# Altium PCB DigitalLabBoard-CS.PcbDoc (part 2 of 3)
Units mm, origin at the board's own origin, x right, y up, seen from the top; angles counter-clockwise.
Board outline 155 x 110 mm, 2 copper layers (Top Layer, Bottom Layer), stack 1.571 mm thick; 189 components, 184 nets, 775 pads, 859 vias.
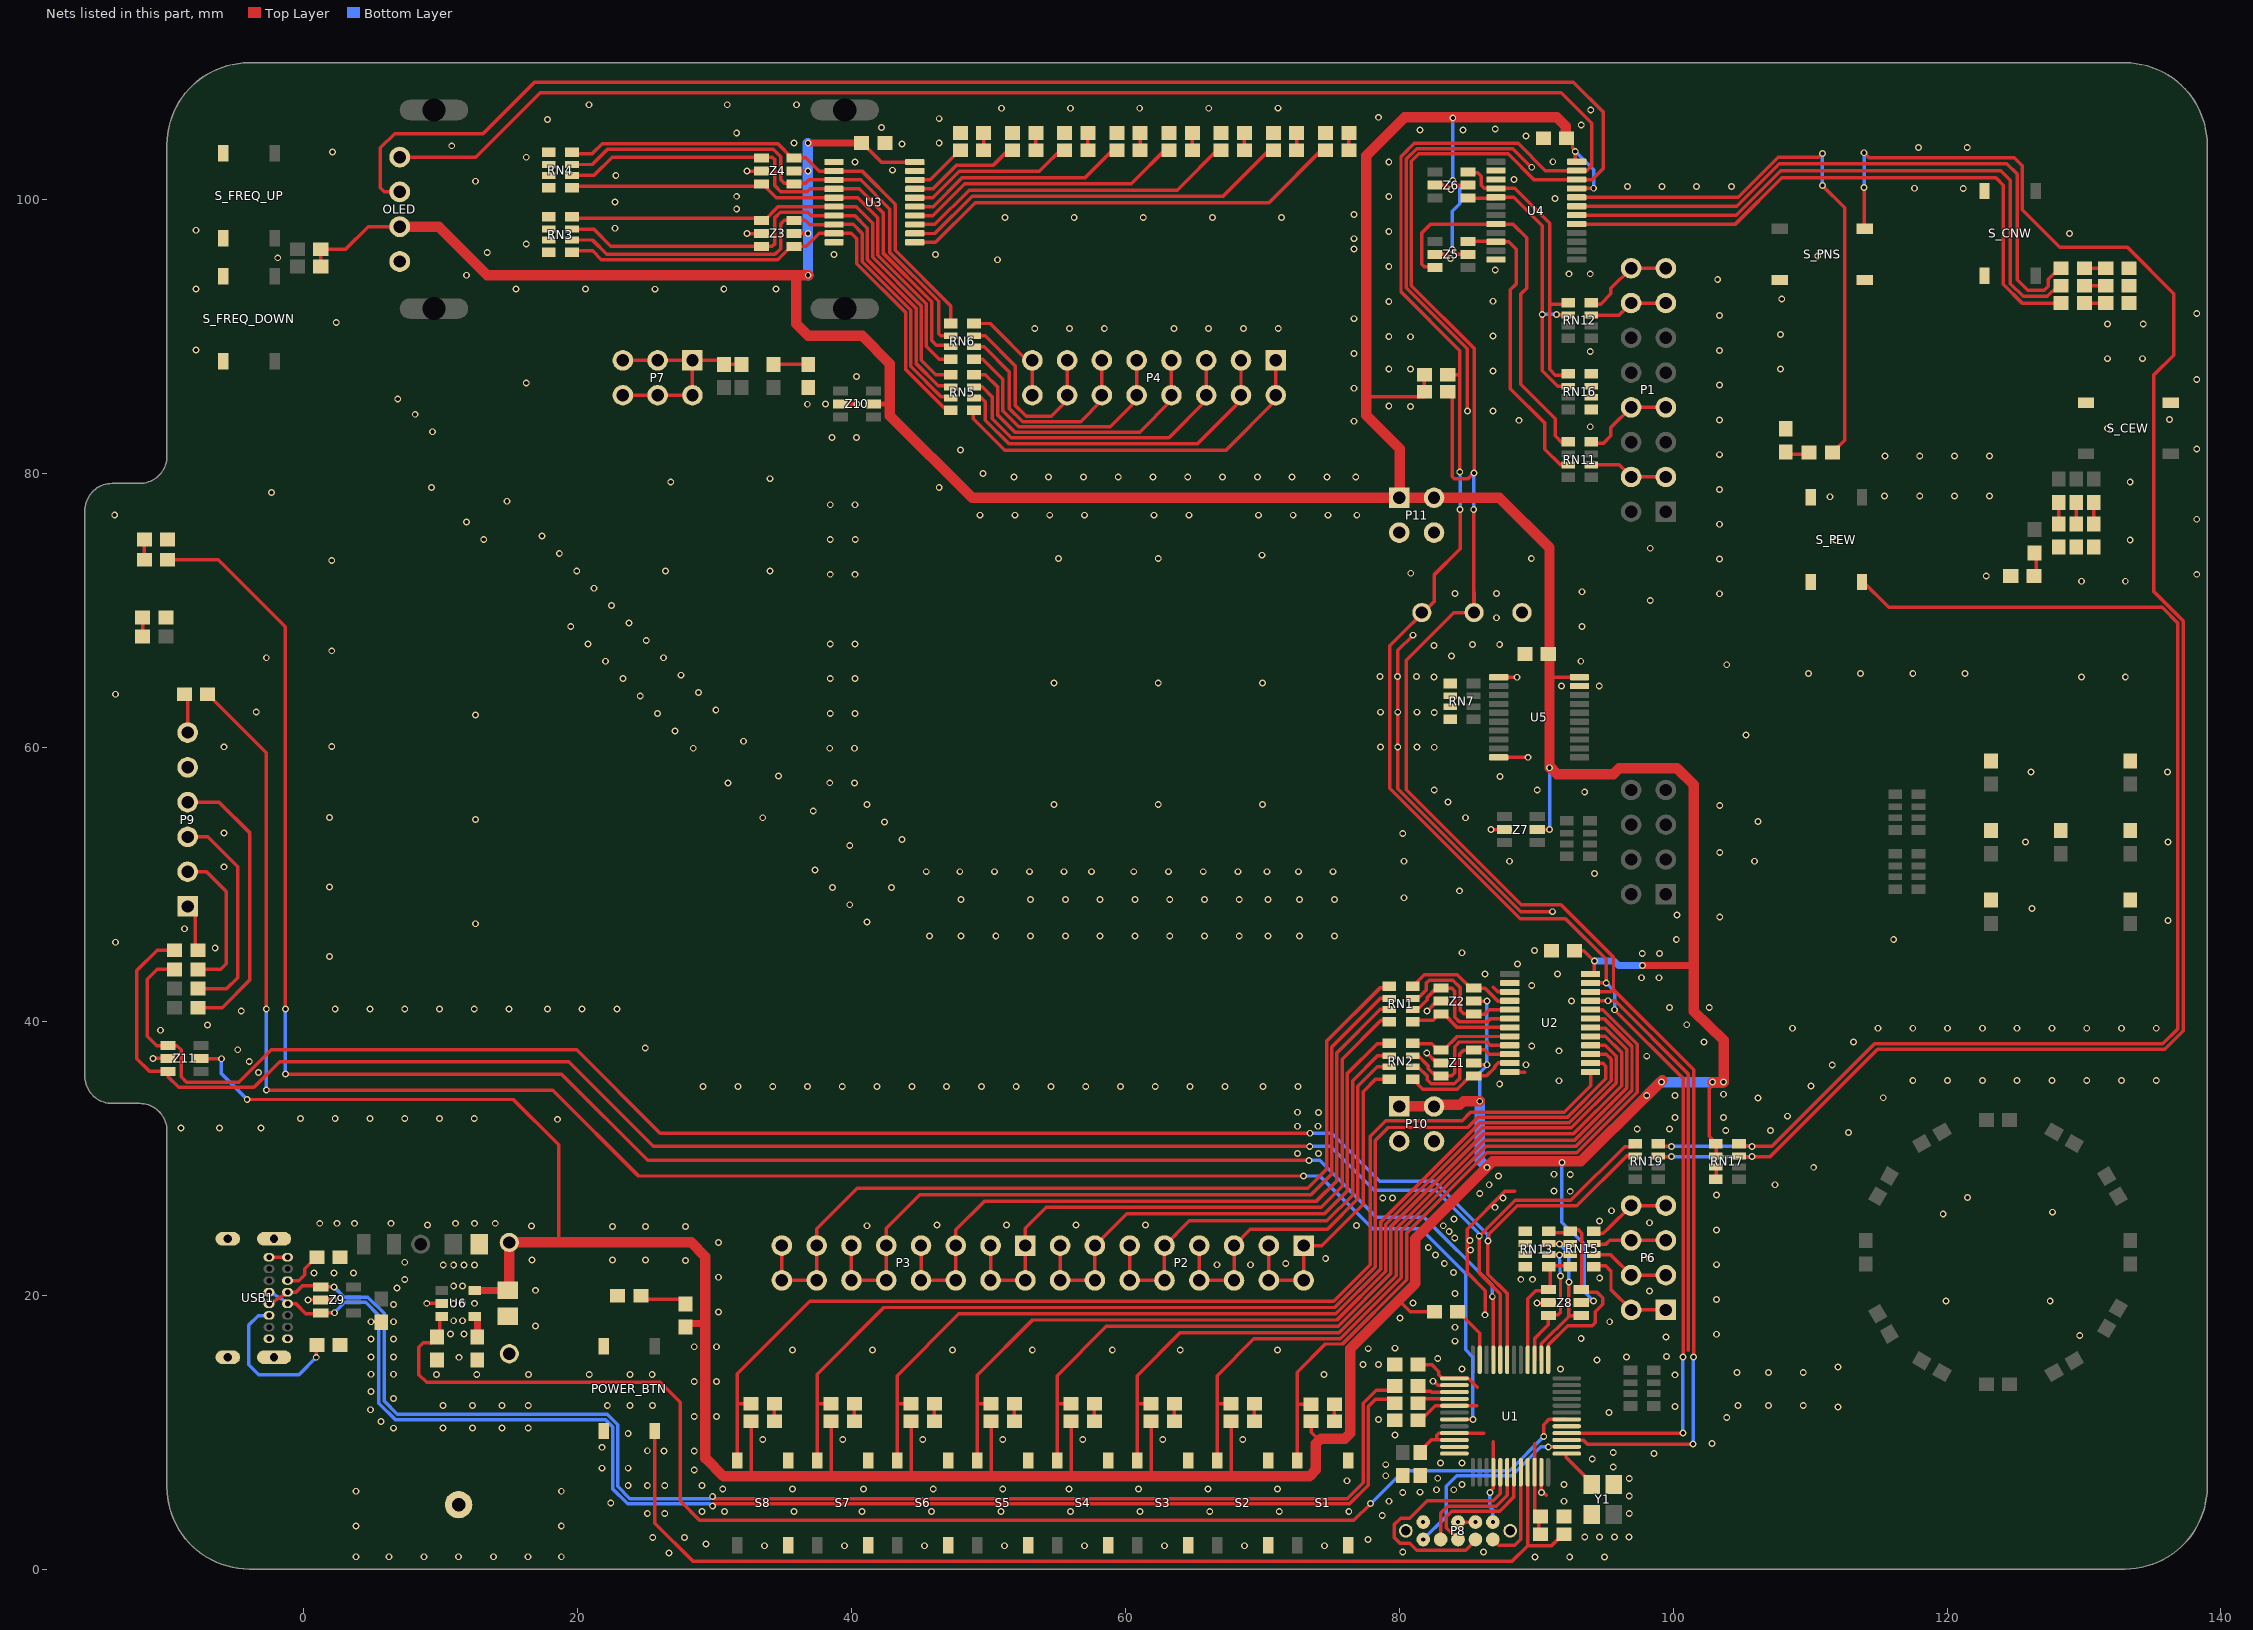
[diagram p2: the nets of this part, all layers, seen from the top]

## Via types
v1: diameter 0.5, hole 0.3, Top Layer to Bottom Layer, tented both sides, 854 vias
v2: diameter 0.5, hole 0.3, Top Layer to Bottom Layer, tented bottom, 5 vias

## Nets (pads, with @x,y where several pads share a name; then routed paths per layer and width w, separated by ;. In a path a pad name is that pad's centre, name@x,y a point inside that pad or via, vN(x,y) a via of type N, cw(c..) or ccw(c..) an arc to the next point about the centre after c; other vN are vias at no path point) (continued)
GND: C1.1 C2.1 C3.1 C4.1 C5.1 C6.1 C7.1 C8.1 C9.1 C10.1 C11.1 C12.1 C13.1 D17.K DIE_LED_A.K DIE_LED_B1.K DIE_LED_B2.K DIE_LED_C1.K DIE_LED_C2.K DIE_LED_D1.K DIE_LED_D2.K LED_0.K LED_1.K LED_2.K LED_3.K LED_4.K LED_5.K LED_6.K LED_7.K N1.1 OLED.1 P8.0 P8.3 P8.5 P8.9 P9.5 P10.3 P10.4 P11.3 P11.4 POWER_BTN.2 POWER_BTN.2b R20.1 R21.1 R22.1 R23.1 R24.1 R25.1 R26.1 R27.1 R29.2 R30.2 R32.2 R35.1 R39.1 R41.1 RN3.1 RN3.2 RN3.3 RN3.4 RN4.1 RN4.2 RN4.3 RN4.4 RN7.1 RN7.2 RN7.3 RN7.4 RN13.1 RN13.2 RN13.3 RN13.4 RN16.5 RN16.6 RN16.7 RN16.8 S1.1 S1.1b S2.1 S2.1b S3.1 S3.1b S4.1 S4.1b S5.1 S5.1b S6.1 S6.1b S7.1 S7.1b S8.1 S8.1b S_CEW.1 S_CEW.1b S_CNW.1 S_CNW.1b S_FREQ_DOWN.1 S_FREQ_DOWN.1b S_FREQ_UP.1 S_FREQ_UP.1b S_PEW.2 S_PEW.2b S_PNS.1 S_PNS.1b TP_Gnd1.1 TP_Gnd2.1 U1.2 U1.11 U1.12 U1.23 U2.2 U2.3 U2.12 U2.21 U3.1 U3.10 U3.19 U4.2 U4.3 U4.12 U5.1 U5.10 U5.19 U6.2 USB1.A1 USB1.A12 USB1.B1 USB1.B12 USB1.SH Y1.2 Y1.4 Z1.2 Z2.2 Z3.2 Z4.2 Z5.2 Z6.2 Z7.2 Z8.2 Z9.2 Z10.2 Z11.2 | length 124.5
  Top Layer w0.254: v1(-11.024,37.287) Z11.2@-9.912,37.287 ; USB1.B12@-2.514,22.761 -1.401,22.761 USB1.A1@-1.165,22.761 ; v1(0.297,19.659) Z9.2@1.23,19.659 v1(2.151,19.659) ; v1(8.97,19.405) U6.2@9.923,19.405 ; POWER_BTN.2b@21.885,10.055 POWER_BTN.2b@21.885,10.082 POWER_BTN.2b@21.885,10.182 ; v1@32.523,102.063 Z4.2@33.38,102.063 ; v1@32.535,97.517 Z3.2@33.392,97.517 ; U3.10@38.267,96.896 U3.10@38.273,96.89 ; v1(81.011,68.198) 79.898,67.085 79.898,56.979 88.871,48.006 v1(91.186,48.006) v1@91.298,48.006 ; v2(81.729,3.428) P8.9@81.748,3.428 P8.9@81.939,3.428 ; v1(82.002,37.693) 82.016,37.693 82.753,36.956 Z1.2@83.021,36.956 ; v1(82.027,40.741) 82.027,40.756 82.753,41.481 Z2.2@83.037,41.481 Z2.2@83.134,41.481 ; v1(82.459,13.715) 82.526,13.715 82.807,13.434 U1.2@84.014,13.434 ; Z5.2@82.553,96.036 Z5.2@82.579,96.062 ; Z5.2@82.58,96.036 Z5.2@82.605,96.011 83.413,96.011 v1(83.729,95.695) ; Z6.2@82.643,101.053 83.452,101.053 v1(83.767,100.737) ; P8.5@84.349,3.419 84.34,3.428 v2(84.288,3.428) v2(85.558,3.428) ; v1(84.974,84.581) 84.974,89.102 80.503,93.573 80.503,102.976 81.26,103.733 88.275,103.733 89.639,102.369 v1(89.673,102.369) ; v1(86.269,18.565) 86.269,20.336 84.948,21.657 84.948,24.812 87.741,27.605 88.446,27.605 ; v1@86.777,54.004 Z7.2@87.673,54.004 ; 86.873,42.484 87.205,42.152 U2.3@88.069,42.152 ; U5.10@87.356,59.279 v1(89.406,59.279) ; U5.1@87.356,65.129 v1(88.592,65.129) ; U2.12@87.619,36.302 87.625,36.296 89.165,36.296 ; v1(90.048,19.416) Z8.2@90.64,19.416 ; U1.23@90.373,7.125 U1.23@90.373,7.075 90.362,5.768 90.739,5.39 ; U2.21@93.969,41.502 95.761,41.502 101.113,36.15 101.113,15.973
  Top Layer w0.381: Z10.2@39.186,85.09 39.199,85.077 40.373,85.077 v1(40.386,85.065)
  other v1: 3.8,0.896 6.22,0.896 8.76,0.896 11.3,0.896 13.84,0.896 16.38,0.896 18.8,0.896 89.901,0.888 92.441,0.888 94.981,0.888 26.67,1.168 80.249,1.244 86.15,1.244 33.64,1.698 39.482,1.698 45.324,1.698 51.166,1.698 57.008,1.698 62.85,1.698 68.692,1.698 74.534,1.698 29.378,1.825 77.7,2.158 25.476,2.311 27.799,2.311 93.543,2.336 94.624,2.336 95.704,2.336 96.785,2.336 3.8,3.136 18.8,3.136 78.751,3.911 25.08,4.063 26.35,4.063 96.794,4.063 29.068,4.19 30.719,4.19 35.799,4.19 40.752,4.19 45.832,4.19 50.912,4.19 55.992,4.19 61.072,4.19 66.152,4.19 71.232,4.19 76.312,4.19 22.413,4.825 79.253,4.952 92.035,4.952 96.794,5.333 80.249,5.587 90.384,5.587 81.512,5.612 3.8,5.676 18.8,5.676 82.728,5.791 83.972,5.791 30.592,5.841 35.672,5.841 40.879,5.841 45.959,5.841 51.039,5.841 55.865,5.841 60.949,5.841 66.025,5.841 71.105,5.841 23.683,6.095 25.08,6.095 26.35,6.095 29.068,6.095 84.584,6.179 92.021,6.179 76.189,6.443 96.794,6.603 82.804,6.629 79.008,6.815 28.509,7.238 21.778,7.365 23.683,7.365 95.62,7.444 79.008,7.619 83.018,7.746 84.567,7.746 94.092,8.026 98.603,8.425 95.62,8.515 26.3,8.61 28.509,8.61 25.08,8.635 21.778,8.889 102.845,9.174 33.513,9.453 39.355,9.453 45.197,9.453 51.039,9.453 56.881,9.453 62.723,9.453 68.565,9.453 79.679,9.776 23.683,9.905 6.545,10.286 10.16,10.287 12.319,10.287 14.478,10.287 16.383,10.287 5.62,10.77 78.471,10.925 103.911,11.075 28.509,11.15 30.135,11.15 95.312,11.429 4.858,11.633 112.039,11.835 100.127,11.87 10.16,11.938 12.319,11.938 14.478,11.938 16.383,11.938 22.159,11.937 23.81,11.937 25.461,11.937 104.724,11.938 106.959,11.937 109.499,11.937 6.545,12.445 4.894,12.953 28.509,13.69 30.135,13.69 100.127,14.183 9.695,14.198 12.623,14.198 16.4,14.198 20.839,14.198 23.81,14.198 25.436,14.198 74.509,14.207 4.894,14.223 6.545,14.223 104.673,14.35 106.959,14.35 109.499,14.35 84.584,14.604 91.781,14.604 112.039,14.756 77.352,14.934 78.471,14.934 94.44,15.275 82.807,15.37 11.32,15.46 96.578,15.476 4.894,15.493 6.545,15.493 99.515,15.519 35.672,16.001 41.514,16.001 47.356,16.001 53.198,16.001 59.04,16.001 63.998,16.001 71.105,16.001 77.733,16.091 79.679,16.128 28.509,16.23 30.135,16.23 84.073,16.638 4.894,16.81 6.545,16.81 93.282,16.823 99.466,16.946 129.692,17.042 10.711,17.156 11.701,17.156 103.162,17.145 84.073,17.658 16.908,17.754 4.894,18.058 6.545,18.058 95.363,18.058 10.939,18.135 11.574,18.135 80.046,18.338 30.287,18.77 6.545,19.328 10.939,19.405 11.574,19.405 12.463,19.405 81.001,19.416 119.913,19.582 127.533,19.582 103.162,19.685 84.073,20.123 98.277,20.315 16.908,20.355 6.799,20.525 10.939,20.675 11.574,20.675 7.365,21.132 88.873,21.157 89.723,21.157 94.633,21.255 30.287,21.31 0.729,21.627 2.195,21.627 3.63,21.627 83.947,21.666 10.177,22.199 10.939,22.199 11.701,22.199 12.463,22.199 66.69,22.218 69.121,22.218 103.162,22.225 71.704,22.301 83.287,22.301 7.365,22.402 27.874,22.541 16.654,22.58 22.54,22.58 24.953,22.58 74.622,22.666 98.277,22.666 82.652,22.936 85.2,23.292 82.118,23.47 30.287,23.85 85.166,24.002 84.049,24.181 83.642,24.638 103.162,24.765 22.53,25.019 24.943,25.019 27.864,25.019 16.629,25.043 41.118,25.071 83.21,25.07 76.86,25.095 9.034,25.12 46.228,25.122 51.308,25.122 56.388,25.122 61.468,25.122 1.16,25.247 2.43,25.247 3.7,25.247 6.367,25.247 11.066,25.247 12.463,25.247 13.977,25.247 98.277,25.285 94.626,25.424 83.998,25.552 119.719,25.932 127.695,26.059 95.488,26.161 86.976,26.416 78.791,27.102 79.502,27.102 87.567,27.102 121.501,27.143 103.162,27.305 85.873,27.419 92.481,27.584 91.298,27.609 86.563,28.067 107.442,28.067 87.249,28.702 92.481,28.804 91.298,28.828 110.261,29.336 72.568,30.353 74.092,30.353 112.801,31.876 103.835,32.029 107.1,32.029 97.373,32.13 99.72,32.13 -8.966,32.207 -6.172,32.207 -3.124,32.207 72.568,32.334 74.066,32.334 18.517,32.842 -0.254,32.893 2.286,32.893 4.826,32.893 7.366,32.893 9.906,32.893 12.446,32.893 100.127,32.977 103.683,32.977 108.356,33.071 72.568,33.358 74.092,33.35 106.197,34.389 115.341,34.416 100.127,34.569 103.683,34.671 29.159,35.23 31.699,35.23 34.239,35.23 36.779,35.23 39.319,35.23 41.859,35.23 44.399,35.23 46.939,35.23 49.479,35.23 52.019,35.23 54.559,35.23 57.099,35.23 59.639,35.23 62.179,35.23 64.719,35.23 67.259,35.23 70.053,35.23 72.593,35.23 110.058,35.281 87.33,35.427 91.658,35.655 117.5,35.686 120.04,35.686 122.58,35.686 125.12,35.686 127.66,35.686 130.2,35.686 132.74,35.686 135.28,35.686 -3.302,36.271 89.243,36.829 111.619,36.818 -3.988,37.059 98.07,37.453 91.654,37.845 -4.826,37.922 24.929,38.05 89.673,38.201 102.26,38.48 113.176,38.48 -10.465,39.345 108.712,39.496 114.96,39.496 117.5,39.496 120.04,39.496 122.58,39.496 125.12,39.496 127.66,39.496 130.2,39.496 132.74,39.496 135.28,39.496 -7.035,39.726 100.99,39.75 -4.572,40.762 2.286,40.894 4.826,40.894 7.366,40.894 9.906,40.894 12.446,40.894 14.986,40.894 17.78,40.894 20.32,40.894 22.86,40.894 99.72,41.02 102.637,41.02 92.569,41.477 95.235,41.503 89.673,42.62 97.688,43.179 98.958,43.179 86.269,43.458 91.553,43.452 88.631,44.195 1.88,44.729 97.739,44.957 99.009,44.957 84.567,45.006 89.876,45.16 -6.477,45.364 -13.767,45.771 100.228,45.973 116.103,45.973 45.696,46.227 47.991,46.227 50.531,46.227 53.071,46.227 55.611,46.227 58.151,46.227 60.691,46.227 63.231,46.227 65.771,46.227 68.311,46.227 70.419,46.227 72.717,46.227 75.257,46.227 -8.712,46.761 12.523,47.128 41.133,47.243 136.129,47.37 103.403,47.624 100.279,47.751 126.212,48.234 39.863,48.513 47.991,48.894 53.071,48.894 55.611,48.894 58.151,48.894 60.691,48.894 63.231,48.894 65.771,48.894 68.311,48.894 70.419,48.894 72.717,48.894 75.257,48.894 80.337,49.021 84.386,49.53 38.593,49.783 42.911,49.783 1.88,49.809 94.245,50.799 45.451,50.926 47.903,50.926 50.443,50.926 52.983,50.926 55.523,50.926 57.531,50.927 60.603,50.926 63.143,50.926 65.683,50.926 68.223,50.926 70.331,50.926 72.629,50.926 75.169,50.926 37.323,51.053 -5.842,51.283 80.337,51.688 88.047,51.688 105.943,51.688 103.403,52.323 39.863,52.831 125.73,53.085 136.129,53.085 43.673,53.288 80.249,53.72 -5.842,53.748 86.701,53.999 42.403,54.558 106.197,54.595 12.523,54.748 33.513,54.863 84.821,54.863 1.88,54.889 37.196,55.371 103.403,55.752 41.133,55.828 54.773,55.828 62.393,55.828 70.013,55.828 83.551,56.006 93.537,56.757 82.553,56.895 90.073,56.895 30.973,57.403 40.208,57.404 38.405,57.416 87.356,57.868 34.656,57.911 126.136,58.211 136.09,58.211 28.433,59.943 38.405,59.944 40.208,59.944 82.553,60.013 -5.842,60.046 78.616,60.034 79.886,60.034 81.283,60.034 2.032,60.071 32.116,60.451 105.308,60.918 27.107,61.213 12.523,62.368 25.837,62.483 38.441,62.483 40.244,62.483 82.553,62.553 -3.48,62.586 78.616,62.574 79.886,62.574 81.283,62.574 30.084,62.737 24.567,63.753 -13.767,63.881 28.814,64.007 91.831,64.479 94.602,64.479 54.773,64.718 62.393,64.718 70.013,64.718 23.297,65.023 38.441,65.035 40.244,65.023 82.535,65.15 129.819,65.15 133.02,65.15 78.598,65.171 79.868,65.171 81.265,65.171 27.544,65.277 109.88,65.404 113.69,65.404 117.5,65.404 121.31,65.404 103.911,66.039 22.027,66.293 93.255,66.293 -2.743,66.547 26.274,66.547 83.805,66.674 2.032,67.056 82.535,67.436 85.355,67.512 87.33,67.512 20.757,67.563 38.441,67.563 40.244,67.563 25.004,67.817 19.487,68.833 93.33,68.833 23.734,69.087 87.107,69.468 22.464,70.357 98.323,70.738 103.378,71.221 84.059,71.246 87.107,71.246 93.33,71.373 21.194,71.627 129.819,72.135 133.02,72.135 122.864,72.516 38.441,72.643 40.244,72.643 138.237,72.643 80.833,72.719 19.924,72.897 26.41,72.897 34.03,72.897 2.032,73.66 103.378,73.761 55.103,73.786 62.393,73.786 89.639,73.789 69.962,74.04 18.654,74.167 98.323,74.548 111.861,75.158 133.375,75.158 13.137,75.183 38.441,75.183 40.27,75.183 17.384,75.437 103.378,76.301 11.867,76.453 138.237,76.668 49.388,76.961 51.928,76.961 54.468,76.961 57.008,76.961 62.088,76.961 64.628,76.961 69.708,76.961 72.248,76.961 74.788,76.961 76.896,76.961 -13.818,76.987 38.441,77.723 40.244,77.723 14.844,77.977 111.455,78.307 115.43,78.358 118.008,78.358 120.548,78.358 123.088,78.358 -2.362,78.613 103.378,78.841 9.327,78.993 46.397,78.994 26.791,79.374 133.375,79.374 34.03,79.628 51.852,79.755 54.392,79.755 56.932,79.755 59.472,79.755 62.012,79.755 64.552,79.755 67.092,79.755 69.632,79.755 72.172,79.755 74.712,79.755 76.82,79.755 49.589,80.009 115.468,81.279 118.008,81.279 120.548,81.279 123.088,81.279 103.378,81.381 47.942,81.711 138.237,81.787 38.563,82.643 40.367,82.643 9.398,83.058 131.724,83.311 93.94,83.417 76.693,83.819 88.737,83.89 103.378,83.921 136.248,83.946 8.128,84.328 86.853,84.581 80.808,84.911 79.233,84.941 36.766,85.065 38.1,85.09 6.859,85.456 76.693,86.232 103.378,86.461 16.241,86.614 138.237,86.867 40.361,87.097 86.853,87.502 79.233,87.629 80.808,87.629 107.848,87.629 131.724,88.391 134.264,88.391 76.693,88.772 93.94,88.921 103.378,89.001 -7.889,89.026 80.808,89.991 79.233,90.021 86.853,90.042 107.848,90.169 53.376,90.586 55.916,90.586 58.456,90.586 63.536,90.586 66.076,90.586 68.616,90.586 71.156,90.586 131.724,90.931 134.33,90.931 2.362,91.034 76.693,91.312 103.378,91.541 138.237,91.693 79.233,92.561 86.853,92.582 107.925,92.76 -7.889,93.472 15.494,93.472 20.574,93.472 25.654,93.467 30.668,93.476 34.483,93.476 103.251,94.182 11.867,94.488 92.38,94.589 93.94,94.589 87.006,94.868 79.233,95.122 50.658,95.62 -1.905,95.758 110.558,95.887 38.717,96.006 46.124,96.006 13.395,96.153 76.693,96.392 16.241,96.773 76.693,97.154 32.37,97.535 128.956,97.535 79.233,97.683 -7.889,97.774 22.733,97.917 51.209,98.703 56.256,98.705 61.303,98.706 66.35,98.708 71.397,98.71 76.693,98.932 31.608,99.313 22.733,99.822 91.362,100.1 79.233,100.223 31.608,100.248 117.627,100.837 121.183,100.825 96.672,100.962 99.172,100.964 101.712,100.964 104.252,100.964 12.522,101.346 88.377,101.473 22.78,101.772 32.37,102.107 42.987,102.158 40.244,102.746 79.233,102.763 91.21,102.775 16.241,103.101 2.083,103.48 117.917,103.809 121.473,103.809 10.795,103.937 43.688,104.082 35.799,104.139 46.397,104.139 89.258,104.647 31.608,104.875 81.519,105.096 84.643,105.104 87.006,105.155 42.182,105.283 93.285,105.445 17.78,105.867 46.397,105.918 78.471,106.019 93.98,106.553 50.945,106.678 55.992,106.68 61.039,106.682 66.086,106.684 71.133,106.686 20.828,106.934 30.922,106.938 35.969,106.94
LED_D0: R11.2 U3.11 | length 33.1
  Top Layer w0.254: U3.11@44.39,96.884 46.124,96.884 49.031,99.791 70.48,99.791 R11.2@74.573,103.885
LED_D1: R12.2 U3.12 | length 29
  Top Layer w0.254: U3.12@44.39,97.534 46.084,97.534 48.798,100.248 67.127,100.248 R12.2@70.763,103.885
LED_D2: R13.2 U3.13 | length 25.1
  Top Layer w0.254: U3.13@44.185,98.196 U3.13@44.617,98.196 46.074,98.196 48.584,100.706 63.774,100.706 R13.2@66.953,103.885
LED_D3: R14.2 U3.14 | length 20.6
  Top Layer w0.254: U3.14@44.644,98.834 45.936,98.834 48.265,101.163 60.421,101.163 R14.2@63.143,103.885
LED_D4: R15.2 U3.15 | length 16.5
  Top Layer w0.254: U3.15@44.644,99.484 45.951,99.484 48.087,101.62 57.068,101.62 R15.2@59.333,103.885
LED_D5: R16.2 U3.16 | length 12.4
  Top Layer w0.254: U3.16@44.644,100.134 45.915,100.134 47.858,102.077 53.716,102.077 R16.2@55.523,103.885
LED_D6: R17.2 U3.17 | length 8.4
  Top Layer w0.254: U3.17@44.644,100.784 45.915,100.784 47.665,102.534 50.363,102.534 R17.2@51.713,103.885
LED_D7: R18.2 U3.18 | length 4.1
  Top Layer w0.254: U3.18@44.617,101.446 45.733,101.446 47.791,103.504 R18.2@47.841,103.504
LED_I0: P4.1 P4.2 RN5.5 | length 27.6
  Top Layer w0.254: RN5.5@48.893,84.627 48.893,84.005 51.187,81.711 67.346,81.711 70.978,85.343 70.978,87.629 P4.1@70.851,87.756
LED_I1: P4.3 P4.4 RN5.6 | length 25.5
  Top Layer w0.254: RN5.6@48.893,85.527 49.482,85.527 49.758,85.251 49.758,83.906 51.496,82.168 65.263,82.168 68.438,85.343 68.438,87.629 P4.3@68.311,87.756
LED_I2: P4.5 P4.6 RN5.7 | length 23.1
  Top Layer w0.254: RN5.7@48.893,86.327 49.544,86.327 50.277,85.594 50.277,83.997 51.649,82.625 63.18,82.625 65.898,85.343 65.898,87.629 P4.5@65.771,87.756
LED_I3: P4.7 P4.8 RN5.8 | length 20.6
  Top Layer w0.254: RN5.8@48.893,87.227 48.913,87.206 48.934,87.227 49.758,87.227 50.658,86.327 50.658,84.309 51.935,83.032 61.047,83.032 63.358,85.343 P4.7@63.358,87.629
LED_I4: P4.9 P4.10 RN6.5 | length 18.6
  Top Layer w0.254: RN6.5@48.893,88.361 49.581,88.361 51.039,86.903 51.039,84.581 52.208,83.413 58.888,83.413 60.818,85.343 60.818,87.629 P4.9@60.691,87.756
LED_I5: P4.11 P4.12 RN6.6 | length 16.3
  Top Layer w0.254: RN6.6@48.893,89.261 49.675,89.261 51.496,87.439 51.496,84.784 52.487,83.794 56.729,83.794 58.278,85.343 P4.11@58.278,87.756
LED_I6: P4.13 P4.14 RN6.7 | length 13.9
  Top Layer w0.254: RN6.7@48.893,90.061 49.75,90.061 51.935,87.876 51.935,84.98 52.741,84.175 54.57,84.175 55.738,85.343 55.738,87.629 P4.13@55.611,87.756
LED_I7: P4.15 P4.16 RN6.8 | length 8.4
  Top Layer w0.254: RN6.8@48.613,91.037 RN6.8@48.893,91.037 ; RN6.8@48.893,90.961 50.12,90.961 53.198,87.883 P4.16@53.198,85.343
LED_IR0: RN3.5 RN5.4 U3.9 Z3.4 | length 37.4
  Top Layer w0.254: RN3.5@19.558,96.259 21.089,96.259 21.728,95.62 34.61,95.62 35.594,96.603 36.696,96.603 37.646,97.553 38.92,97.553 38.928,97.546 39.98,97.546 40.39,97.136 40.39,95.319 43.942,91.767 43.942,87.599 46.716,84.825 RN5.4@47.095,84.825
LED_IR1: RN3.6 RN5.3 U3.8 Z3.6 | length 38.8
  Top Layer w0.254: RN3.6@19.558,97.059 21.076,97.059 22.129,96.006 34.405,96.006 34.822,96.423 34.822,98.228 35.083,98.489 35.804,98.489 35.819,98.503 36.62,98.503 36.941,98.183 U3.8@38.549,98.183 ; U3.8@38.817,98.196 40.107,98.196 40.771,97.532 40.771,95.476 44.323,91.924 44.323,87.833 46.531,85.625 RN5.3@47.195,85.625
LED_IR2: RN3.7 RN5.2 U3.7 Z3.3 | length 38.8
  Top Layer w0.254: RN3.7@19.558,97.859 21.165,97.859 22.424,96.6 Z3.3@33.177,96.6 ; Z3.3@33.419,96.603 34.206,96.603 34.402,96.8 34.402,98.705 34.78,99.082 36.798,99.082 37.048,98.833 U3.7@38.449,98.833 ; U3.7@38.703,98.833 U3.7@38.717,98.846 ; U3.7@38.817,98.846 40.219,98.846 41.152,97.913 41.152,95.634 44.704,92.082 44.704,88.036 46.315,86.425 47.195,86.425 RN5.2@47.293,86.327
LED_IR3: RN3.8 RN5.1 U3.6 Z3.1 | length 36.5
  Top Layer w0.254: RN3.8@19.558,98.659 Z3.1@33.234,98.659 ; Z3.1@33.488,98.659 33.644,98.503 34.624,99.484 U3.6@38.45,99.484 ; U3.6@38.704,99.484 U3.6@38.717,99.496 ; U3.6@38.817,99.496 40.331,99.496 41.533,98.294 41.533,95.792 45.085,92.24 45.085,88.29 46.147,87.228 47.292,87.228 RN5.1@47.293,87.227
LED_IR4: RN4.5 RN6.4 U3.5 Z4.3 | length 36.3
  Top Layer w0.254: RN4.5@19.558,100.972 32.835,100.972 ; Z4.3@33.089,100.972 33.315,101.198 Z4.3@33.431,101.198 ; Z4.3@33.431,101.201 Z4.3@33.431,101.198 ; Z4.3@33.756,101.198 Z4.3@33.431,101.198 ; U3.5@38.463,100.146 34.483,100.146 Z4.3@33.431,101.198 ; U3.5@38.717,100.146 40.443,100.146 41.914,98.675 41.914,95.95 45.466,92.398 45.466,89.293 46.398,88.361 RN6.4@47.243,88.361
LED_IR5: RN4.6 RN6.3 U3.4 Z4.1 | length 38.4
  Top Layer w0.254: RN4.6@19.558,101.772 21.178,101.772 22.507,103.101 34.218,103.101 34.402,102.917 34.402,101.01 34.834,100.578 36.766,100.578 36.984,100.796 U3.4@38.463,100.796 ; U3.4@38.717,100.796 40.555,100.796 42.295,99.056 42.295,96.108 45.847,92.556 45.847,89.72 46.184,89.382 47.122,89.382 RN6.3@47.243,89.261
LED_IR6: RN4.7 RN6.2 U3.3 Z4.4 | length 37.9
  Top Layer w0.254: RN4.7@19.558,102.572 21.064,102.572 22.172,103.68 34.292,103.68 34.834,103.138 34.834,101.477 35.095,101.216 35.817,101.216 35.831,101.201 36.632,101.201 36.877,101.446 U3.3@38.463,101.446 ; U3.3@38.817,101.446 40.667,101.446 42.799,99.314 42.799,96.142 46.36,92.582 46.36,90.21 46.509,90.061 RN6.2@47.243,90.061 RN6.2@47.293,90.061
LED_IR7: RN4.8 RN6.1 U3.2 Z4.6 | length 36
  Top Layer w0.254: RN4.8@19.558,103.372 21.073,103.372 21.782,104.082 34.625,104.082 Z4.6@35.606,103.101 ; Z4.6@35.805,103.057 36.653,103.057 37.634,102.075 38.696,102.075 U3.2@38.717,102.096 40.763,102.096 43.18,99.679 43.18,96.3 47.243,92.237 RN6.1@47.243,90.961 RN6.1@47.293,90.961
NetC12_2: C12.2 U6.4 | length 1.7
  Top Layer w0.508: U6.4@12.67,18.455 C12.2@12.67,16.953 12.67,16.746 C12.2@12.678,16.738
NetC14_1: C14.1 P7.1 P7.2 P7.3 P7.4 P7.5 P7.6 R36.1 | length 16
  Top Layer w0.254: P7.6@23.297,85.725 P7.4@25.837,85.725 P7.2@28.377,85.725 P7.1@28.377,88.265 ; P7.5@23.297,88.265 P7.3@25.837,88.265 P7.1@28.377,88.265 ; C14.1@30.683,87.972 30.39,88.265 P7.1@28.377,88.265 ; C14.1@31.066,87.966 31.072,87.972 R36.1@31.953,87.972
NetD1_A: D1.A R10.1 | length 1.5
  Top Layer w0.254: R10.1@75.257,10.52 D1.A@75.257,12.044
NetD2_A: D2.A R9.1 | length 1.5
  Top Layer w0.254: R9.1@69.415,10.54 D2.A@69.415,12.064
NetD3_A: D3.A R8.1 | length 1.5
  Top Layer w0.254: R8.1@63.573,10.54 D3.A@63.573,12.064
NetD4_A: D4.A R7.1 | length 1.5
  Top Layer w0.254: R7.1@57.731,10.54 D4.A@57.731,12.064
NetD5_A: D5.A R6.1 | length 1.5
  Top Layer w0.254: R6.1@51.889,10.54 D5.A@51.889,12.064
NetD6_A: D6.A R5.1 | length 1.5
  Top Layer w0.254: R5.1@46.047,10.523 D6.A@46.047,12.064
NetD7_A: D7.A R4.1 | length 1.5
  Top Layer w0.254: R4.1@40.205,10.54 D7.A@40.205,12.064
NetD8_A: D8.A R3.1 | length 1.5
  Top Layer w0.254: R3.1@34.363,10.54 D8.A@34.363,12.064
NetD17_A: D17.A R19.1 | length 2.9
  Top Layer w0.254: D17.A@24.934,19.717 R19.1@27.799,19.717
NetD_AEW_K: D_AEW.K R21.2 | length 1.3
  Top Layer w0.254: R21.2@129.438,76.541 D_AEW.K@129.438,77.889
NetD_ANS_K: D_ANS.K R25.2 | length 1.6
  Top Layer w0.254: D_ANS.K@130.034,93.725 R25.2@131.59,93.725
NetD_CLOCK_K: D_CLOCK.K R32.1 | length 2.5
  Top Layer w0.254: D_CLOCK.K@34.29,87.972 R32.1@36.83,87.972
NetD_Fail_K: D_Fail.K R41.2 | length 1.4
  Top Layer w0.254: D_Fail.K@-11.772,68.097 R41.2@-11.772,69.494
NetD_GEW_K: D_GEW.K R22.2 | length 1.3
  Top Layer w0.254: R22.2@130.708,76.541 D_GEW.K@130.708,77.889
NetD_GNS_K: D_GNS.K R26.2 | length 1.3
  Top Layer w0.254: D_GNS.K@130.034,94.995 R26.2@131.382,94.995
NetD_Pass_K: D_Pass.K R39.2 | length 1.5
  Top Layer w0.254: D_Pass.K@-11.645,73.715 R39.2@-11.645,75.183
NetD_PEW_K: D_PEW.K R23.2 | length 1.6
  Top Layer w0.254: R23.2@126.478,72.516 126.517,72.555 D_PEW.K@126.517,74.079
NetD_PNS_K: D_PNS.K R27.2 | length 1.6
  Top Layer w0.254: R27.2@108.229,81.445 108.268,81.406 D_PNS.K@109.792,81.406
NetD_REW_K: D_REW.K R20.2 | length 1.3
  Top Layer w0.254: R20.2@128.168,76.541 D_REW.K@128.168,77.889
NetD_RNS_K: D_RNS.K R24.2 | length 1.6
  Top Layer w0.254: D_RNS.K@130.034,92.455 R24.2@131.59,92.455
NetLED_0_A: LED_0.A R11.1 | length 1.3
  Top Layer w0.254: R11.1@76.312,103.351 LED_0.A@76.312,104.621
NetLED_1_A: LED_1.A R12.1 | length 1.3
  Top Layer w0.254: R12.1@72.502,103.351 LED_1.A@72.502,104.621
NetLED_2_A: LED_2.A R13.1 | length 1.3
  Top Layer w0.254: R13.1@68.692,103.351 LED_2.A@68.692,104.621
NetLED_3_A: LED_3.A R14.1 | length 1.3
  Top Layer w0.254: R14.1@64.882,103.351 LED_3.A@64.882,104.621
NetLED_4_A: LED_4.A R15.1 | length 1.3
  Top Layer w0.254: R15.1@61.072,103.351 LED_4.A@61.072,104.621
NetLED_5_A: LED_5.A R16.1 | length 1.3
  Top Layer w0.254: R16.1@57.262,103.351 LED_5.A@57.262,104.621
NetLED_6_A: LED_6.A R17.1 | length 1.3
  Top Layer w0.254: R17.1@53.452,103.351 LED_6.A@53.452,104.621
NetLED_7_A: LED_7.A R18.1 | length 1.3
  Top Layer w0.254: R18.1@49.642,103.351 LED_7.A@49.642,104.621
NetR29_1: R29.1 USB1.A5 | length 3.3
  Top Layer w0.254: USB1.A5@-1.165,21.061 -0.374,21.061 0.055,21.489 0.055,21.92 0.895,22.761 R29.1@0.945,22.761 ; R29.1@1.136,22.57 R29.1@1.326,22.761
NetR30_1: R30.1 USB1.B5 | length 11.6
  Top Layer w0.254: v1(0.906,15.46) R30.1@0.906,16.523
  Bottom Layer w0.254: USB1.B5@-2.387,18.511 -2.514,18.511 -2.751,18.511 -3.33,18.511 -4.021,17.819 -4.021,14.914 -3.305,14.198 -0.356,14.198 v1(0.906,15.46)
NS_AMBER_LED: D_ANS.A U4.18 | length 45.3
  Top Layer w0.254: U4.18@92.953,98.875 104.616,98.875 107.848,102.107 123.932,102.107 124.612,101.427 124.612,93.877 125.552,92.938 127.33,92.938 128.117,93.725 D_ANS.A@128.334,93.725
NS_CAR_B: P1.7 P1.8 RN11.8 | length 6.8
  Top Layer w0.254: RN11.8@94.092,82.231 94.921,82.231 95.453,82.763 95.453,83.362 P1.8@96.926,84.835 P1.7@99.466,84.835
NS_CAR_O: RN11.1 U4.8 Z5.3 | length 29
  Top Layer w0.254: Z5.3@82.58,95.086 82.544,95.122 81.807,95.122 81.646,95.283 81.646,97.571 82.301,98.225 U4.8@86.603,98.225 ; U4.8@86.98,98.152 U4.8@87.053,98.225 ; RN11.1@92.34,82.231 91.906,82.231 91.374,82.763 91.374,84.013 88.877,86.51 88.877,93.119 89.293,93.535 89.293,97.215 88.283,98.225 U4.8@87.053,98.225 ; U4.8@86.603,98.225 U4.8@87.053,98.225 ; U4.8@86.603,98.225 U4.8@87.053,98.225
NS_GREEN_LED_BTN: D_GNS.A U4.19 | length 46
  Top Layer w0.254: U4.19@92.953,99.525 104.631,99.525 107.747,102.64 124.358,102.64 125.12,101.878 125.12,94.157 125.882,93.395 127.101,93.395 127.381,93.674 127.381,94.181 128.195,94.995 D_GNS.A@128.334,94.995
NS_LIGHTS0_B: P1.15 P1.16 RN12.8 | length 6.8
  Top Layer w0.254: RN12.8@93.94,92.379 94.706,92.379 95.453,93.126 95.453,93.522 P1.16@96.926,94.995 P1.15@99.466,94.995
NS_LIGHTS0_I: RN12.1 RN16.1 U4.4 Z6.6 | length 21.3
  Top Layer w0.254: Z6.6@85.005,102.016 85.041,101.98 85.729,101.98 85.981,101.728 85.981,101.066 86.21,100.837 87.041,100.837 U4.4@87.053,100.825 88.44,100.825 90.972,98.293 90.972,87.612 91.4,87.184 RN16.1@92.284,87.184 ; 91.026,92.379 RN12.1@92.284,92.379
NS_LIGHTS1_B: P1.13 P1.14 RN12.7 | length 5.9
  Top Layer w0.254: RN12.7@93.94,91.579 96.05,91.579 P1.14@96.926,92.455 P1.13@99.466,92.455
NS_LIGHTS1_I: RN12.2 RN16.2 U4.5 Z6.4 | length 22
  Top Layer w0.254: Z6.4@85.005,100.116 U4.5@86.993,100.116 ; U4.5@86.595,100.077 86.955,100.077 U4.5@86.993,100.116 ; U4.5@86.595,100.167 86.603,100.175 88.353,100.175 90.436,98.092 90.436,93.061 90.435,93.06 v1(90.435,91.629) 90.435,87.515 91.565,86.384 RN16.2@92.34,86.384 ; U4.5@87.053,100.175 U4.5@86.993,100.116 ; v1(91.476,91.617) 92.246,91.617 RN12.2@92.284,91.579
  Bottom Layer w0.254: v1(90.435,91.629) 90.441,91.623 91.47,91.623 v1(91.476,91.617)
NS_PED_B: P1.3 P1.4 RN11.6 | length 5.7
  Top Layer w0.254: RN11.6@94.092,80.631 96.05,80.631 P1.4@96.926,79.755 P1.3@99.466,79.755
NS_PED_LED_BN: D_PNS.A U4.20 | length 42.3
  Top Layer w0.254: U4.20@92.953,100.175 104.742,100.175 107.665,103.098 110.617,103.098 v1(110.896,103.377) ; v1(110.896,101.04) 112.522,99.415 112.522,82.436 D_PNS.A@111.492,81.406
  Bottom Layer w0.254: v1(110.896,101.04) v1(110.896,103.377)
NS_PED_O: RN11.3 U4.10 Z5.6 | length 22.3
  Top Layer w0.254: Z5.6@84.98,96.986 Z5.6@85.005,96.961 85.01,96.956 86.588,96.956 87.022,96.956 U4.10@87.053,96.925 88.002,96.925 88.53,96.397 88.53,93.849 88.115,93.434 88.115,86.195 90.612,83.697 90.612,81.787 91.768,80.631 RN11.3@92.284,80.631 ; U4.10@86.588,96.91 86.603,96.925 86.701,96.827 U4.10@87.053,96.827
NS_RED_LED: D_RNS.A U4.17 | length 44.5
  Top Layer w0.254: U4.17@93.285,98.225 104.551,98.225 107.925,101.599 123.576,101.599 124.104,101.071 124.104,93.827 125.476,92.455 D_RNS.A@128.334,92.455
Pass: D_Pass.A U1.45 | length 143.3
  Top Layer w0.254: D_Pass.A@-9.945,73.715 -6.244,73.715 -1.346,68.817 v1(-1.346,40.894) ; v1@-1.346,36.119 18.831,36.119 25.105,29.845 v1(73.406,29.845) ; v1(86.792,19.888) 86.873,19.807 U1.45@86.873,15.275
  Bottom Layer w0.254: v1(-1.346,36.144) v1(-1.346,40.894) ; v1(73.406,29.845) 74.178,29.845 78.318,25.705 81.798,25.705 86.792,20.711 v1(86.792,19.888)
PB_I0: D1.K S1.2 U2.20 | length 50.9
  Top Layer w0.254: S1.2@72.532,7.825 S1.2@72.532,7.925 72.532,12.044 ; D1.K@73.557,12.044 72.532,12.044 ; U2.20@93.969,40.852 94.848,40.852 97.373,38.328 97.373,34.815 92.959,30.401 86.391,30.401 80.532,24.542 80.532,21.113 75.851,16.433 74.585,16.433 72.532,14.38 72.532,12.044
PB_I1: D2.K S2.2 U2.19 | length 55.3
  Top Layer w0.254: S2.2@66.69,7.825 S2.2@66.69,7.925 66.69,12.064 ; D2.K@67.715,12.064 66.69,12.064 ; U2.19@93.969,40.202 94.947,40.202 96.992,38.158 96.992,34.973 92.877,30.858 86.309,30.858 80.151,24.7 80.151,21.271 75.693,16.814 69.378,16.814 66.69,14.126 66.69,12.064
PB_I2: D3.K S3.2 U2.18 | length 59.9
  Top Layer w0.254: S3.2@60.848,7.825 S3.2@60.848,7.925 60.848,12.044 ; D3.K@61.873,12.064 60.868,12.064 60.848,12.044 ; U2.18@93.969,39.552 94.013,39.508 95.05,39.508 96.611,37.947 96.611,35.131 92.796,31.316 86.228,31.316 79.77,24.858 79.77,21.429 75.612,17.271 63.998,17.271 60.848,14.121 60.848,12.044
PB_I3: D4.K S4.2 U2.17 | length 64.6
  Top Layer w0.254: S4.2@55.006,7.825 S4.2@55.006,7.925 55.006,11.937 ; D4.K@56.031,12.064 55.133,12.064 55.006,11.937 ; U2.17@93.969,38.902 95.05,38.902 96.23,37.722 96.23,35.289 92.714,31.773 86.146,31.773 79.389,25.016 79.389,21.587 75.53,17.728 58.608,17.728 55.006,14.126 55.006,11.937
PB_I4: D5.K S5.2 U2.16 | length 69.1
  Top Layer w0.254: S5.2@49.164,7.825 S5.2@49.164,7.925 49.164,11.988 ; D5.K@50.189,12.064 49.24,12.064 49.164,11.988 ; U2.16@93.969,38.252 95.05,38.252 95.849,37.453 95.849,35.495 92.569,32.215 86.049,32.215 79.008,25.173 79.008,21.744 75.449,18.185 53.21,18.185 49.164,14.14 49.164,11.988
PB_I5: D6.K S6.2 U2.15 | length 73.7
  Top Layer w0.254: S6.2@43.322,7.825 S6.2@43.322,7.925 43.322,11.937 ; D6.K@44.347,12.064 43.449,12.064 43.322,11.937 ; U2.15@93.969,37.602 95.112,37.602 95.468,37.246 95.468,35.653 92.411,32.596 85.891,32.596 78.627,25.331 78.627,21.902 75.367,18.643 47.839,18.643 43.322,14.126 43.322,11.937
PB_I6: D7.K S7.2 U2.14 | length 81.5
  Top Layer w0.254: S7.2@37.48,7.825 S7.2@37.48,7.925 37.48,12.064 ; D7.K@38.505,12.064 37.48,12.064 ; U2.14@93.969,36.952 94.862,36.952 95.087,36.727 95.087,35.81 92.253,32.977 85.733,32.977 85.002,32.245 79.196,32.245 78.246,31.295 78.246,22.06 75.285,19.1 42.35,19.1 37.48,14.23 37.48,12.064
PB_I7: D8.K S8.2 U2.13 | length 85
  Top Layer w0.254: S8.2@31.638,7.825 S8.2@31.638,7.925 31.638,12.064 ; D8.K@32.663,12.064 31.638,12.064 ; U2.13@93.969,36.302 93.969,35.283 92.043,33.358 85.202,33.358 84.584,32.74 78.996,32.74 77.865,31.608 77.865,22.218 75.204,19.557 36.942,19.557 31.638,14.253 31.638,12.064
PB_O0: P2.1 P2.2 P2.3 P2.4 RN2.4 | length 23.9
  Top Layer w0.254: P2.3@70.47,23.621 P2.4@70.47,21.081 P2.2@73.01,21.081 P2.1@73.01,23.621 74.321,23.621 77.352,26.652 77.352,34.851 78.284,35.783 RN2.4@79.272,35.783 ; RN2.4@79.272,35.953 RN2.4@79.457,35.953
PB_O1: P2.5 P2.6 P2.7 P2.8 RN2.3 | length 29.2
  Top Layer w0.254: P2.7@65.39,23.621 P2.8@65.39,21.081 P2.6@67.93,21.081 P2.5@67.93,23.621 69.121,24.812 74.754,24.812 76.971,27.029 76.971,35.256 78.391,36.676 79.266,36.676 RN2.3@79.272,36.683
PB_O2: P2.9 P2.10 P2.11 P2.12 RN2.2 | length 34.7
  Top Layer w0.254: P2.11@60.31,23.621 P2.12@60.31,21.081 P2.10@62.85,21.081 P2.9@62.85,23.621 64.654,25.424 74.711,25.424 76.59,27.304 76.59,35.668 78.391,37.469 79.258,37.469 RN2.2@79.272,37.483
PB_O3: P2.13 P2.14 P2.15 P2.16 RN2.1 | length 40.3
  Top Layer w0.254: P2.15@55.23,23.621 P2.16@55.23,21.081 P2.14@57.77,21.081 P2.13@57.77,23.621 60.083,25.933 74.538,25.933 76.209,27.604 76.209,36.19 78.391,38.372 79.261,38.372 RN2.1@79.272,38.383
PB_O4: P3.1 P3.2 P3.3 P3.4 RN1.4 | length 47.4
  Top Layer w0.254: P3.3@50.15,23.621 P3.4@50.15,21.081 P3.2@52.69,21.081 P3.1@52.69,23.621 52.69,24.891 54.215,26.416 74.304,26.416 75.828,27.94 75.828,37.234 78.662,40.068 RN1.4@79.457,40.068
PB_O5: P3.5 P3.6 P3.7 P3.8 RN1.3 | length 52.8
  Top Layer w0.254: P3.7@45.07,23.621 P3.8@45.07,21.081 P3.6@47.61,21.081 P3.5@47.61,23.621 47.61,24.764 49.719,26.873 73.954,26.873 75.447,28.367 75.447,37.717 78.598,40.868 RN1.3@79.457,40.868
PB_O6: P3.9 P3.10 P3.11 P3.12 RN1.2 | length 58.2
  Top Layer w0.254: P3.11@39.99,23.621 P3.12@39.99,21.081 P3.10@42.53,21.081 P3.9@42.53,23.621 42.53,24.891 44.97,27.33 73.55,27.33 75.066,28.846 75.066,38.123 78.611,41.668 RN1.2@79.457,41.668
PB_O7: P3.13 P3.14 P3.15 P3.16 RN1.1 | length 63.6
  Top Layer w0.254: P3.15@34.91,23.621 P3.16@34.91,21.081 P3.14@37.45,21.081 P3.13@37.45,23.621 37.45,24.852 40.411,27.813 73.306,27.813 74.685,29.192 74.685,38.529 78.623,42.468 RN1.1@79.457,42.468
PB_OR0: RN2.5 U2.11 Z1.4 | length 8.5
  Top Layer w0.254: RN2.5@80.783,35.953 81.71,35.026 84.232,35.026 ; 84.219,35.029 85.2,36.009 86.365,36.009 86.976,36.62 86.976,36.698 87.238,36.959 88.061,36.959 U2.11@88.069,36.952
PB_OR1: RN2.6 U2.10 Z1.6 | length 10.2
  Top Layer w0.254: RN2.6@80.783,36.753 80.956,36.58 81.463,36.58 82.034,36.009 82.034,35.729 82.337,35.427 84.026,35.427 84.428,35.829 84.428,37.634 84.689,37.895 85.411,37.895 85.425,37.909 86.226,37.909 86.547,37.589 U2.10@87.923,37.589 ; U2.10@87.911,37.576 U2.10@87.923,37.589 ; U2.10@87.934,37.599 U2.10@87.923,37.589 ; U2.10@88.057,37.589 U2.10@87.923,37.589
PB_OR2: RN2.7 U2.9 Z1.3 | length 10.3
  Top Layer w0.254: RN2.7@80.889,37.553 81.303,37.553 82.117,36.74 82.117,36.536 82.647,36.006 Z1.3@83.037,36.006 ; Z1.3@83.025,36.009 83.812,36.009 84.047,36.244 84.047,38.149 84.386,38.488 86.404,38.488 86.654,38.239 U2.9@88.055,38.239 ; U2.9@87.991,38.226 88.017,38.2 U2.9@88.055,38.239 ; U2.9@88.069,38.252 U2.9@88.055,38.239
PB_OR3: RN2.8 U2.8 Z1.1 | length 7.8
  Top Layer w0.254: RN2.8@80.889,38.353 82.365,38.353 82.809,37.909 83.25,37.909 84.23,38.89 U2.8@88.055,38.89 ; U2.8@88.043,38.876 U2.8@88.069,38.902
PB_OR4: RN1.5 U2.7 Z2.3 | length 8
  Top Layer w0.254: RN1.5@81.001,40.084 82.478,40.084 82.921,40.528 Z2.3@83.362,40.528 ; Z2.3@83.037,40.531 83.262,40.531 84.242,39.551 88.068,39.551 U2.7@88.069,39.552
PB_OR5: RN1.6 U2.6 Z2.1 | length 10.1
  Top Layer w0.254: RN1.6@81.001,40.884 81.341,40.884 82.027,41.571 82.027,41.74 82.718,42.431 Z2.1@83.037,42.431 83.824,42.431 84.059,42.196 84.059,40.291 84.398,39.952 86.416,39.952 86.666,40.202 U2.6@88.069,40.202
PB_OR6: RN1.7 U2.5 Z2.4 | length 10.3
  Top Layer w0.254: RN1.7@80.757,41.668 81.354,41.668 81.952,42.266 81.952,42.774 82.189,43.01 83.898,43.01 84.44,42.468 84.44,40.807 84.702,40.545 85.423,40.545 Z2.4@85.437,40.531 86.238,40.531 86.559,40.852 U2.5@88.069,40.852
PB_OR7: RN1.8 U2.4 Z2.6 | length 8.4
  Top Layer w0.254: RN1.8@80.895,42.484 81.822,43.412 84.232,43.412 85.212,42.431 Z2.6@85.437,42.431 86.238,42.431 87.188,41.481 88.048,41.481 U2.4@88.069,41.502
PED_EW_BTN: RN17.8 RN19.8 S_PEW.1b | length 96.3
  Top Layer w0.254: RN19.8@98.92,31.066 99.125,30.861 v1(99.873,30.861) ; RN17.8@105.017,30.861 v1(105.765,30.861) 107.214,30.861 114.706,38.353 135.757,38.353 136.866,39.461 136.866,69.074 135.709,70.23 115.74,70.23 S_PEW.1b@113.787,72.183
  Bottom Layer w0.254: v1(99.873,30.861) v1(105.765,30.861)
PED_EW_TMS: R42.1 RN19.1 U1.44 Z11.3 | length 139
  Top Layer w0.254: R42.1@-9.435,45.187 -10.714,45.187 -12.192,43.709 -12.192,37.277 -11.252,36.337 Z11.3@-9.912,36.337 -9.922,36.327 -9.922,35.955 -9.146,35.179 -3.646,35.179 -1.767,37.059 19.329,37.059 25.527,30.861 v1(73.457,30.861) ; U1.44@87.373,15.275 87.373,20.084 85.837,21.62 85.837,24.299 88.457,26.919 92.529,26.919 96.453,30.843 96.997,30.843 RN19.1@97.22,31.066
  Bottom Layer w0.254: v1(73.457,30.861) 74.955,30.861 78.156,27.661 82.652,27.661 85.837,24.475 v1(85.837,24.308) v1@85.837,24.284
PED_NS_BTN: RN17.7 RN19.7 S_PNS.2 | length 132.7
  Top Layer w0.254: RN19.7@98.921,30.165 98.962,30.124 v1(99.873,30.124) ; RN17.7@104.854,30.124 v1(105.765,30.124) 107.1,30.124 114.922,37.947 135.89,37.947 137.247,39.304 137.247,69.231 135.113,71.365 135.113,87.208 136.55,88.645 136.55,93.144 133.175,96.519 128.238,96.519 125.501,99.256 125.501,102.488 124.917,103.072 114.3,103.072 v1(113.944,103.428) ; S_PNS.2@113.896,97.886 113.944,97.934 v1(113.944,100.888)
  Bottom Layer w0.254: v1(99.873,30.124) v1(105.765,30.124) ; v1(113.944,100.888) v1(113.944,103.428)
PED_NS_TDI: R43.1 RN19.2 U1.43 Z11.1 | length 136.8
  Top Layer w0.254: R43.1@-9.435,43.79 -10.714,43.79 -11.43,43.074 -11.43,38.913 -10.744,38.227 -9.922,38.227 Z11.1@-9.912,38.237 -9.902,38.227 -9.271,38.227 -8.966,37.922 -8.966,35.955 -8.571,35.56 -4.75,35.56 -2.388,37.922 19.914,37.922 26.01,31.826 v1(73.482,31.826) ; U1.43@87.873,15.275 87.873,20.123 86.472,21.524 v1(86.472,23.952) 86.519,23.999 86.519,24.442 88.615,26.538 92.97,26.538 96.598,30.166 RN19.2@97.22,30.166
  Bottom Layer w0.254: v1(73.482,31.826) 75.058,31.826 78.563,28.321 82.55,28.321 86.472,24.399 v1(86.472,23.952)
PH0: P6.7 P6.8 RN15.8 | length 6.1
  Top Layer w0.254: RN15.8@94.231,24.512 94.894,24.512 95.312,24.929 ; 95.312,24.928 P6.8@96.926,26.542 P6.7@99.466,26.542
PH0_I: RN13.8 RN15.1 U1.37 Z8.6 | length 15.4
  Top Layer w0.254: U1.37@90.873,15.275 90.873,16.358 92.294,17.779 94.102,17.779 94.299,17.976 94.299,18.785 94.848,19.335 94.848,19.799 94.44,20.207 93.484,20.207 Z8.6@93.286,20.405 93.33,20.45 93.33,24.521 93.088,24.764 92.845,24.764 RN15.1@92.623,24.542 ; RN13.8@91.059,24.567 RN15.1@92.426,24.567
PH1: P6.5 P6.6 RN15.7 | length 5.3
  Top Layer w0.254: RN15.7@94.231,23.735 95.096,23.735 95.363,24.002 P6.6@96.926,24.002 P6.5@99.466,24.002
PH1_I: RN13.7 RN15.2 U1.38 Z8.4 | length 11.8
  Top Layer w0.254: U1.38@90.373,15.225 90.373,16.44 92.439,18.505 Z8.4@93.286,18.505 ; RN13.7@91.023,23.735 91.037,23.749 v1(91.694,23.749) 92.347,23.749 RN15.2@92.36,23.735 ; 92.39,18.505 v1@92.39,20.905
  Bottom Layer w0.254: v1(91.694,23.749) 92.39,23.053 v1(92.39,20.954)
PH2: P6.3 P6.4 RN15.6 | length 5.8
  Top Layer w0.254: RN15.6@94.231,22.935 95.453,22.935 P6.4@96.926,21.462 P6.3@99.466,21.462
PH2_I: RN13.6 RN15.3 U1.39 Z8.3 | length 10.3
  Top Layer w0.254: U1.39@89.873,15.225 89.873,16.823 90.547,17.497 90.55,17.497 90.886,17.832 Z8.3@90.886,18.505 90.946,18.565 91.593,18.565 91.77,18.743 v1(91.77,21.387) ; RN13.6@91.023,22.935 91.024,22.936 v1(91.694,22.936) 92.359,22.936 RN15.3@92.36,22.935
  Bottom Layer w0.254: v1@91.694,21.463 v1(91.77,21.387) v1(91.694,22.936) v1@91.7,22.931
PH3: P6.1 P6.2 RN15.5 | length 7.4
  Top Layer w0.254: RN15.5@94.231,22.135 95.062,22.135 95.459,21.738 95.459,20.389 P6.2@96.926,18.922 P6.1@99.466,18.922
PH3_I: RN13.5 RN15.4 U1.40 Z8.1 | length 9.2
  Top Layer w0.254: U1.40@89.373,15.275 89.373,19.75 89.955,20.332 90.812,20.332 Z8.1@90.886,20.405 ; Z8.1@91.023,20.482 91.023,22.135 RN15.4@92.36,22.135
POWER_BTN: POWER_BTN.1b R38.2 U1.21 | length 80.8
  Top Layer w0.254: POWER_BTN.1b@25.635,10.182 POWER_BTN.1b@25.635,10.082 25.635,3.338 28.389,0.583 88.258,0.583 89.373,1.698 ; U1.21@89.373,7.075 89.373,1.698 ; R38.2@92.148,2.793 92.148,2.731 91.115,1.698 89.373,1.698
PTB2: U1.29
PWR_EN: R35.2 U1.30 U6.3 | length 101.3
  Top Layer w0.254: U6.3@9.923,18.455 9.923,17.156 R35.2@9.72,16.953 9.72,16.903 9.347,16.53 8.731,16.53 8.399,16.198 8.399,14.197 8.97,13.626 26.039,13.626 27.475,12.191 27.475,4.974 28.893,3.555 76.68,3.555 v1(77.903,4.778) ; v1(90.551,9.677) 90.551,10.545 90.931,10.925 U1.30@92.223,10.925
  Bottom Layer w0.254: v1(77.903,4.778) 80.313,7.188 88.062,7.188 v1(90.551,9.677)
RESETb: P8.10 U1.26 | length 14.6
  Top Layer w0.254: P8.10@81.748,2.158 v2(81.75,2.16) ; v1(90.881,8.915) 92.212,8.915 92.213,8.914 U1.26@92.223,8.925
  Bottom Layer w0.254: v2(81.75,2.16) 83.428,3.838 83.428,6.05 84.186,6.807 88.22,6.807 90.328,8.915 v1(90.881,8.915)
SCL: OLED.3 R2.1 TP_SCL.1 U1.27 U2.22 U4.22 | length 245.9
  Top Layer w0.254: OLED.3@7,100.572 6.988,100.584 5.87,100.584 5.588,100.866 5.588,103.784 6.629,104.826 13.081,104.826 16.84,108.585 92.71,108.585 94.91,106.385 94.91,102.285 94.1,101.475 89.822,101.475 87.945,103.352 81.418,103.352 80.884,102.818 80.884,93.73 85.478,89.137 85.478,80.097 84.987,79.607 84.04,79.607 83.868,79.779 83.868,85.648 R2.1@83.538,85.978 ; v1(85.431,77.367) 85.431,71.366 ; TP_SCL.1@85.456,69.85 TP_SCL.1@85.431,69.849 ; TP_SCL.1@85.456,69.85 85.456,71.341 85.431,71.366 ; U1.27@92.223,9.425 92.227,9.421 93.437,9.421 93.739,9.119 v1(101.448,9.119) ; U2.22@93.969,42.152 95.488,42.152 95.642,42.306 ; v1@101.494,15.494 101.494,36.454 95.642,42.306 ; TP_SCL.1@85.431,69.849 85.431,71.366 ; TP_SCL.1@85.431,69.849 83.977,69.849 80.503,66.375 80.503,56.913 88.902,48.514 91.805,48.514 95.642,44.677 95.642,42.306
  Bottom Layer w0.254: v1(85.431,77.367) 85.431,80.05 v1@85.432,80.051 ; v1(101.448,9.119) 101.46,9.131 101.46,15.481 v1(101.473,15.494)
  other v1: 85.456,80.051
SDA: OLED.4 R1.1 TP_SDA.1 U1.28 U2.23 U4.23 | length 226.1
  Top Layer w0.254: OLED.4@7,103.112 12.561,103.112 17.272,107.823 91.835,107.823 94.067,105.591 94.067,102.496 93.696,102.125 90.671,102.125 88.682,104.114 81.102,104.114 80.122,103.134 80.122,93.265 84.415,88.973 84.415,87.223 ; R1.1@83.911,87.223 84.415,87.223 ; v1(84.415,80.111) 84.415,87.223 ; v1(84.44,77.367) 84.44,74.496 82.535,72.591 82.535,70.65 79.309,67.424 79.309,57.029 88.841,47.497 92.136,47.497 95.108,44.525 v1(95.108,42.802) U2.23@93.969,42.802 ; U1.28@92.226,9.928 U1.28@92.223,9.925 v1(100.711,9.925) ; v1(95.707,40.843) 100.719,35.83 v1@100.719,15.495
  Bottom Layer w0.254: 84.432,79.78 84.44,79.772 v1(84.44,77.367) ; v1(95.108,42.802) 95.739,42.171 95.739,40.875 v1(95.707,40.843) ; v1(100.711,9.925) 100.711,15.486 v1(100.719,15.494)
SWD_CLK: P8.4 U1.17 | length 17.8
  Top Layer w0.254: P8.4@85.558,2.082 84.847,1.371 81.265,1.371 80.757,1.879 80.046,1.879 79.614,2.31 79.614,3.225 80.097,3.707 80.757,3.707 82.028,4.978 86.853,4.978 87.373,5.498 U1.17@87.373,7.075
SWD_DIO: P8.2 U1.20 | length 7.4
  Top Layer w0.254: P8.2@86.828,2.158 87.261,1.725 88.431,1.725 88.873,2.167 U1.20@88.873,7.125
SWD_Rx: P8.8 U1.18 | length 9
  Top Layer w0.254: P8.8@83.018,2.158 83.037,2.177 83.037,4.091 83.544,4.597 87.071,4.597 87.873,5.399 U1.18@87.873,7.125
SWD_Tx: P8.6 U1.19 | length 9.4
  Top Layer w0.254: P8.6@84.288,2.158 83.424,3.022 83.424,3.809 83.832,4.216 87.325,4.216 88.373,5.264 U1.19@88.373,7.125
TCK: P9.4 R45.2 | length 21
  Top Layer w0.254: P9.4@-8.492,56.006 -6.195,56.006 -3.937,53.748 -3.937,43.022 -5.964,40.996 R45.2@-7.735,40.996 R45.2@-7.93,40.996
TDI: P9.2 R43.2 | length 11.1
  Top Layer w0.254: P9.2@-8.492,50.926 -7.111,50.926 -5.664,49.479 -5.664,44.196 -6.071,43.79 R43.2@-7.735,43.79 R43.2@-7.93,43.79
TDO: P9.3 R44.2 | length 16.1
  Top Layer w0.254: P9.3@-8.492,53.466 -7.009,53.466 -4.826,51.283 -4.826,43.19 -5.648,42.367 R44.2@-7.93,42.367
TMS: P9.1 R42.2 | length 3.5
  Top Layer w0.254: P9.1@-8.492,48.386 -7.93,47.824 -7.93,45.381 R42.2@-7.735,45.187
USBD_N: R31.2 U1.4 | length 2.8
  Top Layer w0.254: R31.2@81.404,12.115 81.714,12.425 U1.4@84.073,12.425
USBD_P: R28.2 U1.3 | length 2.9
  Top Layer w0.254: R28.2@81.368,13.36 81.741,12.987 82.295,12.987 82.357,12.925 U1.3@84.073,12.925
USBD_R_N: R31.1 USB1.A7 USB1.B7 Z9.3 | length 102.3
  Top Layer w0.254: USB1.A7@-1.165,19.361 -0.574,19.361 0.144,18.643 1.227,18.643 1.298,18.714 v1@2.227,18.714 ; v1(29.856,4.596) 30.021,4.762 76.364,4.762 77.733,6.131 77.733,11.87 78.247,12.383 79.401,12.383 R31.1@79.668,12.116
  Bottom Layer w0.254: USB1.B7@-2.387,20.211 -1.282,19.514 -1.129,19.418 USB1.A7@-1.038,19.361 ; v1(2.227,18.719) 2.982,19.473 4.521,19.473 5.478,18.516 5.478,12.109 6.671,10.917 22.002,10.917 22.54,10.378 22.54,5.874 23.653,4.761 29.624,4.761 29.789,4.596 v1(29.856,4.596)
USBD_R_P: R28.1 USB1.A6 USB1.B6 Z9.1 | length 102.4
  Top Layer w0.254: USB1.B6@-2.514,19.361 -1.286,20.134 -1.165,20.211 -0.574,20.211 -0.111,20.673 Z9.1@1.23,20.673 ; Z9.1@1.23,20.609 1.241,20.598 v1(2.202,20.598) ; v1(29.856,5.308) 30.02,5.143 76.207,5.143 77.352,6.289 77.352,12.1 78.308,13.056 79.363,13.056 R28.1@79.668,13.36
  Bottom Layer w0.254: v1(2.202,20.598) 2.946,19.854 4.679,19.854 5.859,18.673 5.859,12.267 6.829,11.298 22.159,11.298 22.921,10.536 22.921,6.031 23.81,5.142 29.624,5.142 29.789,5.308 v1(29.856,5.308)
Vcc: C1.2 C4.2 C5.2 C6.2 C11.2 OLED.2 P10.1 P10.2 P11.1 P11.2 R1.2 R2.2 R3.2 R4.2 R5.2 R6.2 R7.2 R8.2 R9.2 R10.2 R19.2 R33.2 R34.2 R40.1 RN17.1 RN17.2 RN17.3 RN17.4 TP_Vdd.1 U2.24 U3.20 U4.21 U4.24 U5.20 U6.5 Z1.5 Z2.5 Z3.5 Z4.5 Z5.5 Z6.5 Z7.5 Z8.5 Z10.5 Z11.5 | length 502.6
  Top Layer w0.254: Z11.5@-7.512,37.287 -7.487,37.262 v1(-6.02,37.262) ; v1(-4.14,34.29) 15.291,34.29 18.603,30.977 18.603,23.886 18.603,23.85 ; R34.2@1.231,95.123 R33.2@1.231,96.393 1.238,96.4 3.055,96.4 4.687,98.032 OLED.2@7,98.032 ; TP_Vdd.1@15.003,23.85 TP_Vdd.1@15.003,23.886 ; 32.663,6.809 R3.2@32.663,10.794 ; Z4.5@35.683,102.063 Z4.5@35.836,102.215 ; Z3.5@35.805,97.535 v1@36.808,97.535 ; Z4.5@35.805,102.107 v1@36.809,102.107 ; 38.505,6.781 R4.2@38.505,10.794 ; C6.2@40.735,104.14 40.785,104.14 42.182,102.743 44.614,102.743 U3.20@44.617,102.746 U3.20@44.519,102.844 ; 44.347,6.781 R5.2@44.347,10.794 ; 50.189,6.781 R6.2@50.189,10.794 ; 56.031,6.781 R7.2@56.031,10.794 ; 61.873,6.781 R8.2@61.873,10.794 ; 67.715,6.809 R9.2@67.715,10.794 ; R10.2@73.557,10.794 73.557,9.993 74.153,9.397 ; 77.582,85.648 77.613,85.617 R2.2@81.807,85.617 ; 79.948,19.631 80.794,18.785 R40.1@82.564,18.785 ; R2.2@81.838,85.978 R1.2@81.838,87.223 ; R1.2@82.168,87.179 R1.2@82.211,87.223 ; v1(83.868,96.355) 84.212,96.011 84.954,96.011 Z5.5@84.98,96.036 ; v1(83.906,101.397) 84.25,101.053 Z6.5@84.992,101.053 ; Z1.5@85.437,36.956 85.564,36.829 v1(86.391,36.829) ; Z2.5@85.437,41.481 85.441,41.477 v1@86.32,41.477 ; Z7.5@90.073,54.004 v1(90.97,54.004) ; 91.089,65.129 U5.20@93.156,65.129 ; C4.2@92.31,104.459 92.647,104.122 92.647,103.796 92.848,103.596 v1(92.848,103.529) 92.848,102.873 92.946,102.775 U4.24@92.953,102.775 ; U4.21@93.285,100.825 93.297,100.837 v1(94.194,100.837) ; C1.2@93.317,45.16 93.483,45.16 v1(94.245,44.398) U2.24@94.245,43.55 ; Z8.5@93.721,19.582 v1(94.168,19.582) ; v1(102.87,35.56) 102.87,35.299 102.637,35.066 102.637,31.594 103.162,31.069 RN17.4@103.162,28.469
  Top Layer w0.381: Z10.5@41.586,85.09 42.799,85.09
  Top Layer w0.508: U6.5@12.623,20.355 C11.2@14.495,20.355 ; R19.2@27.874,17.92 29.287,17.92 29.327,17.96 ; v1(36.83,104.14) v1(36.83,104.14) 40.735,104.14 C6.2@40.736,104.139 ; v1(97.75,44.068) 101.498,44.068
  Top Layer w0.762: OLED.2@7,98.032 9.851,98.032 13.395,94.488 35.969,94.488 ; C11.2@14.876,20.355 15.003,20.482 TP_Vdd.1@15.003,23.85 18.567,23.85 18.603,23.886 ; 18.603,23.85 28.285,23.85 29.327,22.807 29.327,17.96 29.327,8.084 ; 29.378,8.046 30.643,6.781 38.505,6.781 44.347,6.781 50.189,6.781 56.031,6.781 61.873,6.781 73.442,6.781 73.899,7.238 73.899,9.143 74.153,9.397 74.28,9.524 76.007,9.524 76.414,9.93 76.414,16.091 78.555,18.232 78.555,18.238 79.948,19.631 81.167,20.85 81.167,24.111 v1(86.391,29.336) 86.822,29.766 93.266,29.766 v1(98.07,34.57) v1@99.187,35.687 ; v1(36.83,94.488) 35.969,94.488 ; P10.1@79.995,33.781 P10.2@82.535,33.781 82.651,33.897 84.428,33.897 84.692,34.161 v1(85.873,34.161) ; P11.1@80.025,78.66 80.025,81.807 77.582,84.25 77.582,85.648 77.582,103.211 80.39,106.019 91.51,106.019 92.147,105.382 C4.2@92.147,104.505 ; v1(90.968,58.521) 90.968,74.573 87.31,78.231 P11.2@82.535,78.231 P11.1@79.995,78.231 48.797,78.231 42.799,84.229 42.799,85.09 42.799,88.036 40.774,90.061 36.834,90.061 35.969,90.926 35.969,94.488 ; v1@91.019,58.571 91.542,58.048 95.61,58.048 96.057,58.495 100.279,58.495 101.498,57.276 101.498,44.068 101.498,40.741 103.683,38.614 v1(103.683,35.56) v1@102.898,35.56
  Bottom Layer w0.254: v1(-6.02,37.262) -6.02,36.17 v1(-4.14,34.29) ; v1(83.868,96.355) 83.868,99.172 84.415,99.719 84.415,100.888 v1(83.906,101.397) ; v1@83.906,101.397 v1(83.907,105.968) ; v1(85.873,34.161) 85.873,36.23 86.472,36.829 v1@86.432,36.869 ; v1(86.391,36.829) v1(86.391,41.477) ; v1(90.968,58.521) v1(90.968,58.521) 90.969,54.005 v1(90.97,54.004) ; v1(91.872,29.693) 91.872,25.333 93.493,23.712 93.493,20.258 v1(94.168,19.582) ; v1(92.848,103.529) 94.194,102.183 v1(94.194,100.837)
  Bottom Layer w0.508: v1(94.245,44.398) 95.667,44.398 95.997,44.068 v1(97.75,44.068)
  Bottom Layer w0.762: v1@36.791,104.14 36.796,102.107 v1@36.806,97.535 ; v1(36.815,97.535) 36.815,94.503 v1(36.83,94.488) ; v1(85.873,34.161) 85.873,29.854 v1@86.345,29.382 ; v1(98.07,34.57) 99.034,35.509 99.087,35.56 v1(99.136,35.56) v1(102.87,35.56) v1@103.639,35.56
  other v1: 36.815,102.107
VddSample: R40.2 U1.47 | length 4.2
  Top Layer w0.254: R40.2@84.264,18.785 84.314,18.785 85.873,17.225 U1.47@85.873,15.275
Vout33: C2.2 C3.2 C7.2 C8.2 P8.1 R38.1 U1.1 U1.5 U1.9 U1.10 U1.16 U1.22 | length 29.3
  Top Layer w0.254: C2.2@81.379,14.934 82.357,14.934 82.877,14.414 82.877,14.183 83.136,13.925 85.036,13.925 85.7,13.261 ; C8.2@81.404,10.972 81.67,10.972 82.623,11.925 85.647,11.925 ; C3.2@81.872,8.502 81.872,8.96 82.337,9.425 U1.10@84.023,9.425 ; 82.733,9.515 82.733,9.776 82.882,9.925 86.15,9.925 ; v1@86.741,5.588 v1(86.614,5.588) 86.614,5.655 86.864,5.905 86.864,7.066 U1.16@86.873,7.075 86.873,9.294 ; 89.873,9.153 89.873,4.155 90.194,3.834 R38.1@90.194,2.539
  Bottom Layer w0.254: v1(86.614,5.588) 86.614,4.552 86.828,4.338 v2(86.828,3.428)
Vref: P9.6 R37.2 | length 2.9
  Top Layer w0.254: R37.2@-8.724,63.881 -8.492,63.649 P9.6@-8.492,61.086
Vref_R: R37.1 U1.7 | length 136.1
  Top Layer w0.254: R37.1@-7.024,63.881 -2.743,59.6 v1(-2.743,40.894) ; v1@-2.794,34.95 -2.743,34.95 18.186,34.95 24.435,28.702 v1(73.01,28.702) ; U1.7@84.023,10.925 84.026,10.922 v1(85.369,10.922)
  Bottom Layer w0.254: v1(-2.743,34.976) v1(-2.743,40.894) ; v1(73.01,28.702) 74.198,28.702 78.059,24.841 81.559,24.841 84.84,21.561 84.84,16.005 85.369,15.476 v1(85.369,10.922)
XTAL: U1.25 Y1.1 | length 3
  Top Layer w0.254: U1.25@92.173,8.425 92.173,8.16 94.054,6.279 Y1.1@94.054,6.179
pads on no net: M8.0 POWER_BTN.1 RN10.4 RN10.5 S1.2b S2.2b S3.2b S4.2b S5.2b S6.2b S7.2b S8.2b S_CEW.2 S_CNW.2 S_FREQ_UP.2b S_PEW.1 S_PNS.2b U1.13 U1.14 U1.15 U2.1 U4.1 U5.11 USB1.A8 USB1.B8 Z9.4 Z9.6 Z10.1 Z10.6
copper on no net: | length 0.3
  Top Layer w0.254: 3.63,20.609 3.828,20.411

## Polygon pours and split planes (outlines as drawn)
no net on Multi-Layer (solid): -24.115,63.166
no net on Top Overlay (solid, pour order 2): 95.946,69.81
no net on Top Overlay (solid, pour order 0): 91.324,70.814
GND on Top Layer "Top Layer-Gnd" (solid, remove dead copper, pour order 14): -16,110 139,110 139,0 -16,0
Vout33 on Top Layer "Top Layer-Vout33" (solid, pour order 13): 85.456,13.842 90.739,13.842 90.739,8.508 85.456,8.508
GND on Top Layer "Top Layer-No Net" (solid, pour order 15): 87.133,12.425
GND on Bottom Layer "Bottom Layer-Gnd" (solid, remove dead copper, pour order 12): -16,110 139,110 139,-0.334 -16,-0.334

## Keep-outs
Keep-Out Layer:
  the board outline again, w0.254